# Altium PCB NANO33BLE.PcbDoc (part 1 of 2)
Units mm, origin at the board's own origin, x right, y up, seen from the top; angles counter-clockwise.
Board outline 43.18 x 17.78 mm, 4 copper layers (TOP, GND, SIG, BOTTOM), stack 1.586 mm thick; 73 components, 66 nets, 343 pads, 193 vias.
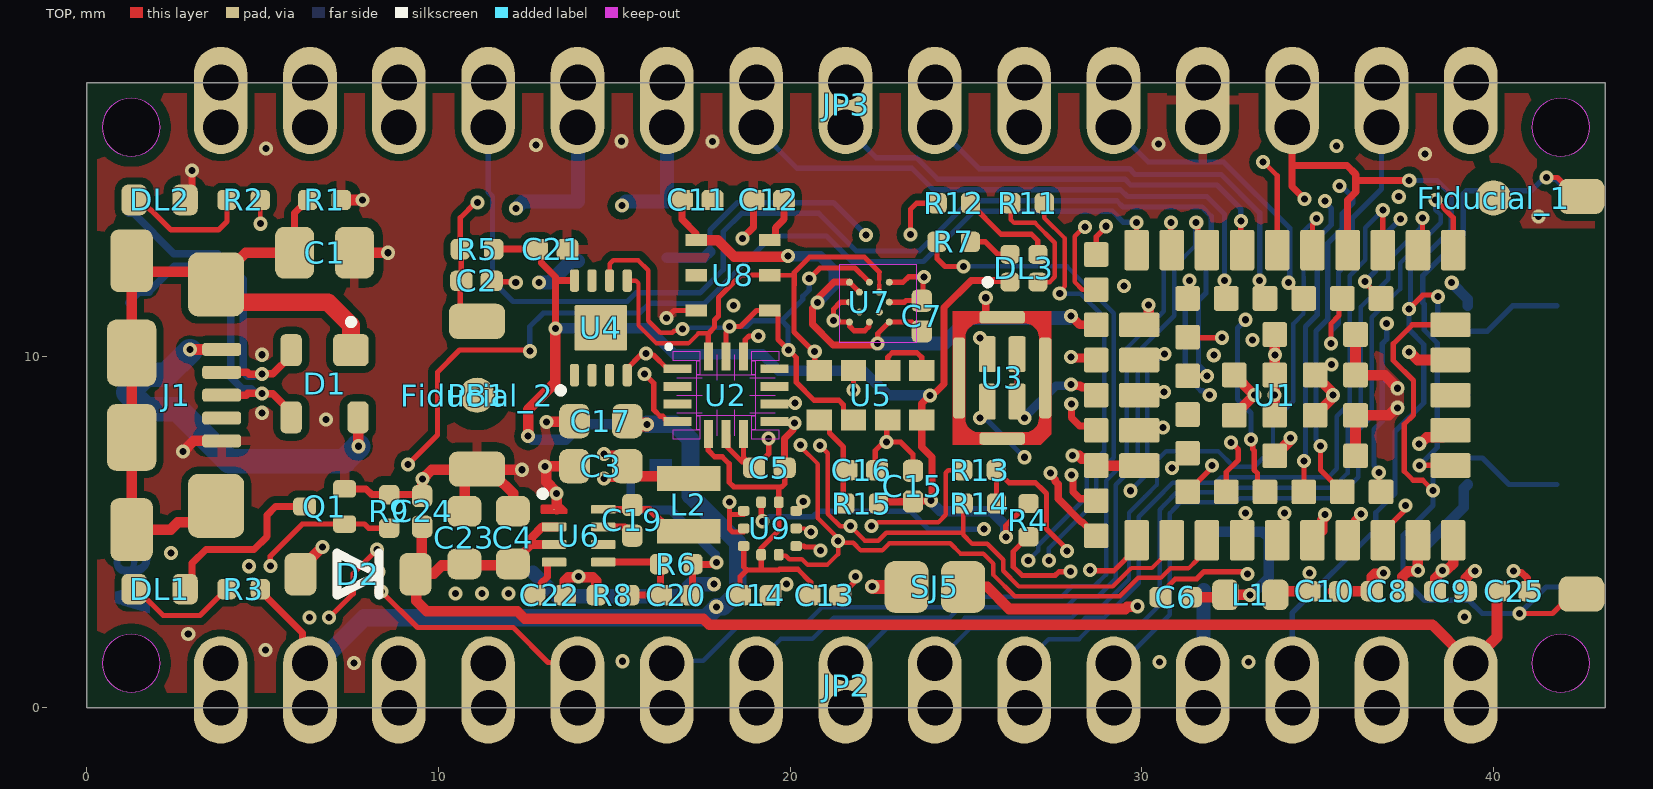
[diagram p0: TOP view]
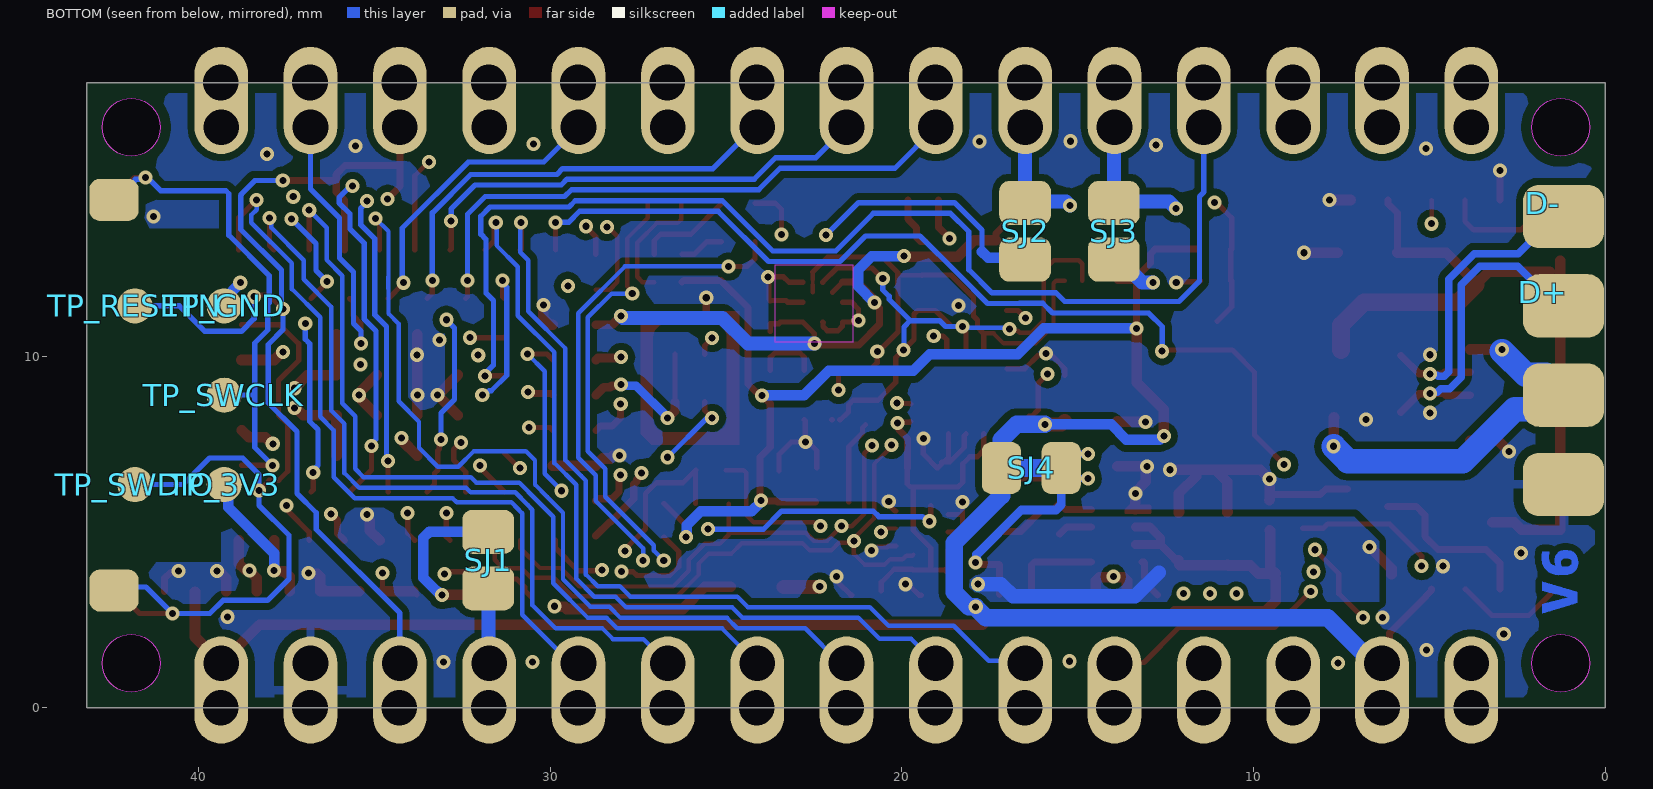
[diagram p1: BOTTOM view, seen from below]
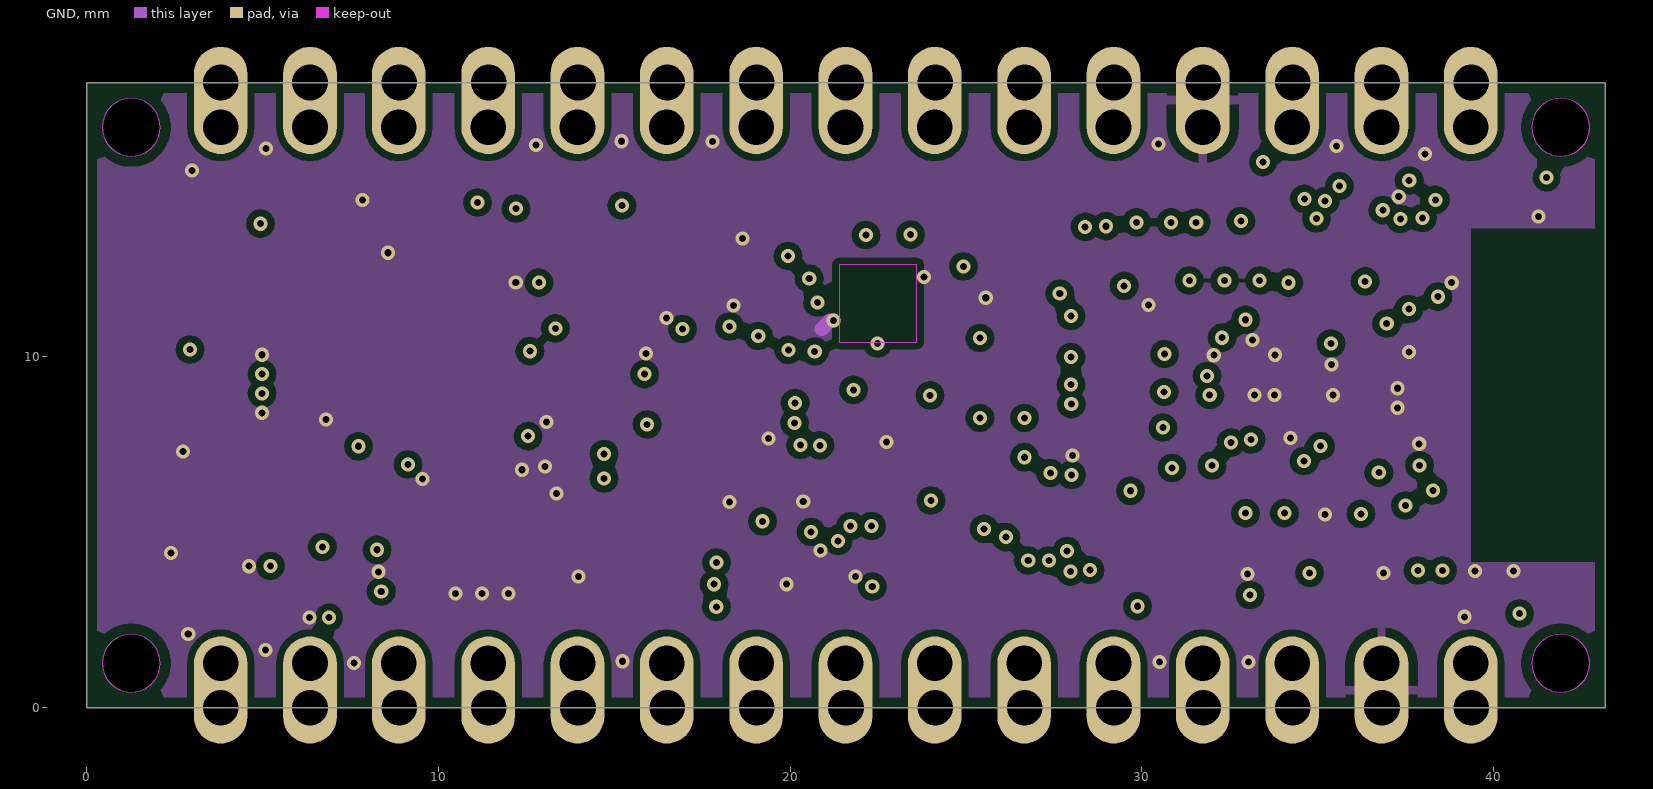
[diagram p2: GND]
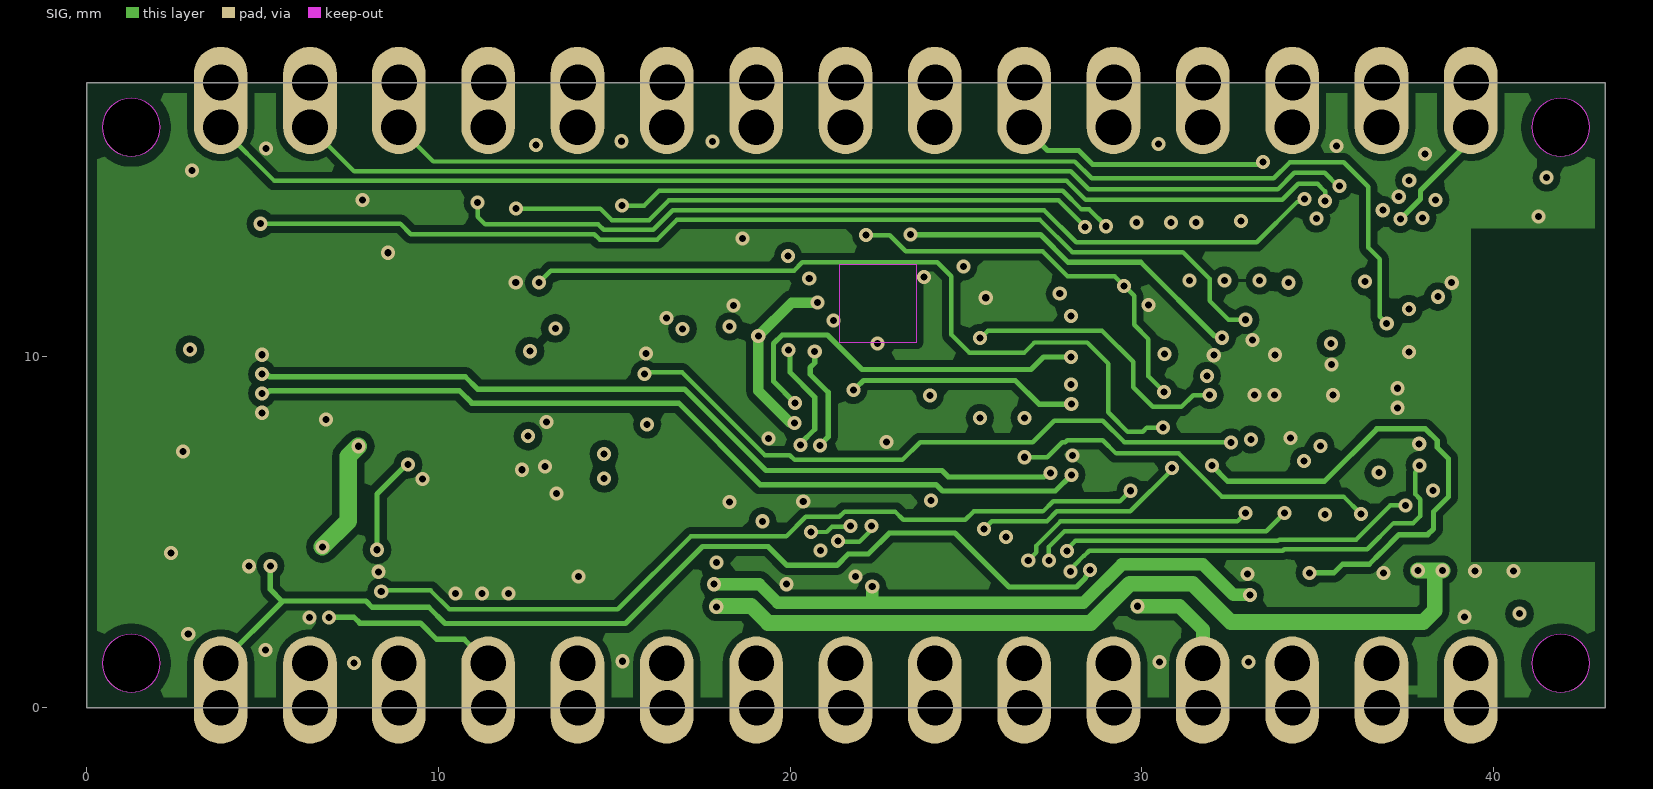
[diagram p3: SIG]
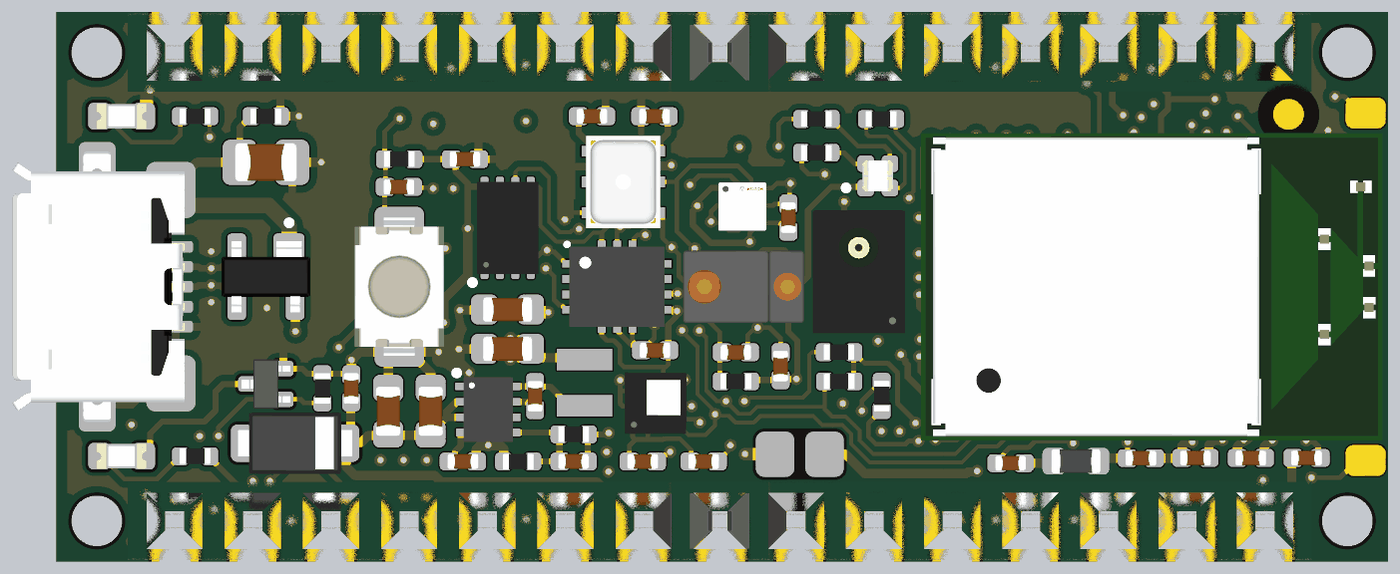
[diagram p5: 3D render of the assembled board from above, using the file's embedded part models]

## Layer stack, top to bottom
Top Solder: solder mask 0.0102, Solder Resist, Dk 3.5
TOP: signal copper 0.018
Dielectric 1: prepreg 0.14, PP-014, Dk 4.2
GND: signal copper 0.035
Dielectric2: core 1.2, FR-4, Dk 4.8
SIG: signal copper 0.035
Dielectric3: prepreg 0.14, PP-014, Dk 4.2
BOTTOM: signal copper 0.018
Bottom Solder: solder mask 0.0102, Solder Resist, Dk 3.5

## Board outline
43.18,0 0,0 0,17.78 43.18,17.78
cut-out: 41.91,0.445 ccw(c41.91,1.27) 42.735,1.27 ccw(c41.91,1.27) 41.91,2.095 ccw(c41.91,1.27) 41.084,1.27 ccw(c41.91,1.27)
cut-out: 41.91,15.684 ccw(c41.91,16.51) 42.735,16.51 ccw(c41.91,16.51) 41.91,17.335 ccw(c41.91,16.51) 41.084,16.51 ccw(c41.91,16.51)
cut-out: 1.27,15.684 ccw(c1.27,16.51) 2.095,16.51 ccw(c1.27,16.51) 1.27,17.335 ccw(c1.27,16.51) 0.445,16.51 ccw(c1.27,16.51)
cut-out: 1.27,0.445 ccw(c1.27,1.27) 2.095,1.27 ccw(c1.27,1.27) 1.27,2.095 ccw(c1.27,1.27) 0.445,1.27 ccw(c1.27,1.27)

## Design rules (kind name [scope] priority, off if disabled: settings)
BoardOutlineClearance USBbottomPADS [(ObjectKind = 'Pad') And (Component = 'Free') And (AsMM(PadXSize_AllLayers) = 2.3) And (AsMM(PadYSize_AllLayers) = 1.8)] p1: gap=0 ignorepadtopadclearanceinfootprint=FALSE
BoardOutlineClearance swdio_swclk [(ObjectKind = 'Pad') And (Name = 'Free-JTAG_PAD')] p2: gap=0 ignorepadtopadclearanceinfootprint=FALSE
BoardOutlineClearance Silk [(OnLayer('Top Overlay') OR OnLayer('Bottom Overlay'))] p3: gap=0 ignorepadtopadclearanceinfootprint=FALSE
BoardOutlineClearance MountingHoles [(ObjectKind = 'Pad') And (Name = 'Free-MH')] p4: gap=0 ignorepadtopadclearanceinfootprint=FALSE
BoardOutlineClearance Header_Castellated [((ObjectKind = 'Pad') And (Component = 'JP2')) OR                                                                                    ((ObjectKind = 'Pad') And (Component = 'JP3'))] p5: gap=0 ignorepadtopadclearanceinfootprint=FALSE
BoardOutlineClearance [All] p6: gap=0.3 ignorepadtopadclearanceinfootprint=FALSE
Clearance BGAclearance [WithinRoom('RoomU7')] p1: gap=0.108 ignorepadtopadclearanceinfootprint=TRUE
Clearance GND_POLYGONS [(InNamedPolygon('GND_TOP') OR InNamedPolygon('GND_2') OR InNamedPolygon('GND_3') OR InNamedPolygon('GND_BOT'))] p2: gap=0.2 ignorepadtopadclearanceinfootprint=FALSE
Clearance "Generic clearance 0.15mm" [All] p3: gap=0.15 ignorepadtopadclearanceinfootprint=FALSE
ComponentClearance [All] p1: gap=0 collisioncheckmode=3 verticalgap=0 showdistances=FALSE
DiffPairsRouting [InDifferentialPairClass('USB')] p1: maxlimit=0.254 minlimit=0.15 mostfreqgap=0.254 toplayer_maxgap=0.15 toplayer_prefgap=0.15 toplayer_minwidth=0.21 toplayer_maxwidth=0.21 toplayer_prefwidth=0.21 midlayer14_mingap=0.25 midlayer14_maxgap=0.25 midlayer14_prefgap=0.25 midlayer14_minwidth=0.15 midlayer14_maxwidth=0.15 midlayer14_prefwidth=0.15 bottomlayer_maxgap=0.15 bottomlayer_prefgap=0.15 bottomlayer_minwidth=0.21 bottomlayer_maxwidth=0.21 bottomlayer_prefwidth=0.21 impedanceprofiledriven=TRUE impedanceprofileid={9B09AC36-4A16-4C97-8BAC-77357264EF75} impedanceprofilevalue=90.000000 maxuncoupledlength=12.7
HoleSize [All] p1: absolutevalues=TRUE maxlimit=6 minlimit=0.2 maxpercent=80.000 minpercent=20.000
HoleToHoleClearance [All] p1: gap=0.25 allowstackedmicrovias=TRUE
MinimumSolderMaskSliver MinimumSolderMaskSliver_1 [(ObjectKind = 'Pad') And (Component = 'Fiducial_1') And (Name = 'Fiducial_1-1')] p1: minsoldermaskwidth=-1
MinimumSolderMaskSliver [All] p2: minsoldermaskwidth=0.147
NetAntennae Inductor [(ObjectKind = 'Component') And (Comment = 'MAKK2016T3R3M')] p1: netantennaetolerance=10
NetAntennae [All] p2: netantennaetolerance=0
PolygonConnect [All] p1: thpad.connectstyle=Relief thpad.reliefconductorwidth=0.254 thpad.reliefentries=4 thpad.polygonreliefangle="90 Angle" thpad.airgapwidth=0.254 smdpad.connectstyle=Relief smdpad.reliefconductorwidth=0.254 smdpad.reliefentries=4 smdpad.polygonreliefangle="90 Angle" smdpad.airgapwidth=0.254 via.connectstyle=Direct via.reliefconductorwidth=0.254 via.reliefentries=4 via.polygonreliefangle="90 Angle" via.airgapwidth=0.254
RoomDefinition RoomU7 [All] p1: confinementstyle=ConfineIn formatcopy=TRUE lockcomponents=FALSE outline 21.348,12.507 23.7,12.507 23.7,10.4 21.348,10.4
RoomDefinition NANO33BLE [InComponentClass('NANO33BLE')] p2: confinementstyle=ConfineIn formatcopy=TRUE lockcomponents=FALSE outline 0,0 43.18,0 43.18,17.78 0,17.78
RoutingVias [All] p1: holewidth=0.2 width=0.4 viastyle="Through Hole" minholewidth=0.2 minwidth=0.4 maxholewidth=0.2 maxwidth=0.4
ShortCircuit SJ4 [Component = 'SJ4' vs (InNet('+3V3') OR InNet('NetC3_2'))] p1: allowed=TRUE
ShortCircuit [All] p2: allowed=FALSE
SilkToSilkClearance [All] p1: silktosilkclearance=0.2
SilkToSolderMaskClearance [IsPad] p1: minsilkscreentomaskgap=0 clearancetoexposedcopper=TRUE
SolderMaskExpansion Solder_VIA [IsVia] p1: expansion=0.102 istentingtop=TRUE
SolderMaskExpansion [All] p2: expansion=0.102 istentingtop=FALSE
UnRoutedNet [All] p1: checkbadconnections=TRUE
Width BGAwidth [WithinRoom('RoomU7')] p1: maxlimit=3 minlimit=0.108 preferedwidth=0.15 midlayer1_minwidth=0.127 midlayer14_minwidth=0.127 bottomlayer_minwidth=0.127 minimp=50.000000 maximp=50.000000 favimp=50.000000
Width [All] p2: maxlimit=5 minlimit=0.127 preferedwidth=0.2 minimp=50.000000 maximp=50.000000 favimp=50.000000
20 further rules are at their usual default settings.

## Classes and differential pairs
differential pair class USB: USB
pad class SMDPaste_OFF: FD1-P$1 J3-4
differential pair USB: +USB_P -USB_N

## Components (designator, comment, footprint, x,y, rotation, side; value= is the part's Value field where it differs from the comment)
C1 "FV21X472K102ECG" CAP-0805 6.765,12.94 r180 top value=4.7nF
C2 "GRM155R61H104KE19D" CAP-0402 11.085,12.14 r0 top value=100nF
C3 "C1608A106M250NT" CAP-0603 14.62,6.87 r0 top value=10µF
C4 "C1608A106M250NT" CAP-0603 12.12,4.84 r270 top value=10µF
C5 "0402B104K160CT" CAP-0402 19.412,6.825 r180 top value=100nF
C6 "GRM155R71H102KA01D" CAP-0402 30.965,3.148 r180 top value=1nF
C7 "GRM155R61H104KE19D" CAP-0402 23.745,11.14 r270 top value=100nF
C8 "GRM155R61H104KE19D" CAP-0402 36.975,3.32 r0 top value=100nF
C9 "GRM155R61H104KE19D" CAP-0402 38.775,3.32 r0 top value=100nF
C10 "GRM155R71H102KA01D" CAP-0402 35.2,3.312 r0 top value=1nF
C11 "GRM155R61H104KE19D" CAP-0402 17.362,14.44 r0 top value=100nF
C12 "GRM155R61H104KE19D" CAP-0402 19.392,14.44 r180 top value=100nF
C13 "C1005B103K500NT" CAP-0402 20.991,3.205 r0 top value=10nF
C14 "C1005A475M6R3NT" CAP-0402 19.012,3.205 r0 top value=4.7µF
C15 "CL05A105KP5NNNC" CAP-0402 23.494,6.305 r270 top value=1µF
C16 "CL05A105KP5NNNC" CAP-0402 22.038,6.76 r180 top value=1µF
C17 "C1608A106M250NT" CAP-0603 14.62,8.15 r0 top value=10µF
C19 "GRM155R61H104KE19D" CAP-0402 15.515,5.33 r270 top value=100nF
C20 "0402N220J500CT" CAP-0402 16.765,3.205 r0 top value=22pF
C21 "GRM155R61H104KE19D" CAP-0402 13.235,13.04 r180 top value=100nF
C22 "CL05A105KP5NNNC" CAP-0402 13.165,3.205 r180 top value=1µF
C23 "C1608A106M250NT" CAP-0603 10.74,4.84 r270 top value=10µF
C24 "GRM155R61H104KE19D" CAP-0402 9.54,5.585 r90 top value=100nF
C25 "CL05A105KP5NNNC" CAP-0402 40.585,3.32 r180 top value=1µF
D1 "PRTR5V0U2X,215" SOT190P230X110-4N 6.765,9.215 r180 top
D2 "PMEG6020AELRX" SOD123-1 7.715,3.8 r180 top
D+ "CMP-018-0005-A.3" TP-1.00MM#1 1.778,11.811 r0 top
D- "CMP-018-0005-A.3" TP-1.00MM#1 1.778,14.351 r0 top
DL1 "KPT-1608YC" LEDC1608X80N-AK 2.075,3.375 r180 top
DL2 "HSMG-C190" LEDC1608X80N-AK 2.075,14.44 r180 top
DL3 "SMLP34RGB2W3" SMLP34RGB2W 26.65,12.5 r0 top
Fiducial_1 "Fiducial mark 1mm with 2mm solder" "Fiducial mark 1mm with circle-Footprint-1" 40,14.5 r90 top
Fiducial_2 "Fiducial mark 1mm with 2mm solder" "Fiducial mark 1mm with circle-Footprint-1" 11.1,8.89 r90 top
J1 "ZX62-AB-5PA(31)" ZX62-AB-5PA 1.28,8.89 r270 top
JP2 "PINHD-1X15-NANO-ANALOG-CASTELLATED" PINHD-1X14_5VF#1 3.81,1.27 r180 top locked
JP3 "PINHD-1X15-NANO-DIGITAL-CASTELLATED" PINHD-1X14_5VF#2 39.37,16.51 r0 top locked
L1 "BLM18EG101TN1D" L-0603 33.088,3.213 r0 top
L2 "MAKK2016T3R3M" MAKK2016T3R3M-Footprint-1 17.12,5.77 r90 top value=3.3µH
PB1 "IT-1185AP1C-160G-GTR" C&K_PTS820_NO_HOLES-1 11.1,8.89 r90 top
Q1 "2N7002T-7-F" SOT523 6.765,5.725 r90 top
R1 "CRCW04021M00FKED" RES-0402 6.765,14.44 r180 top value=1M
R2 "CRCW0402330RJNED" RES-0402 4.465,14.44 r0 top value=330
R3 "CRCW0402330RJNED" RES-0402 4.465,3.375 r0 top value=330
R4 "RC0402FR-074K7L" RES-0402 26.779,5.335 r90 top value=4.7k
R5 "RC0402FR-074K7L" RES-0402 11.1,13.04 r0 top value=4.7k
R6 "CRCW0402976KFKED" RES-0402 16.765,4.085 r0 top value=976k
R7 "CRCW04021K00FKEDC" RES-0402 24.655,13.25 r0 top value=1k
R8 "CRCW0402220KFKED" RES-0402 14.965,3.205 r0 top value=220k
R9 "CRCW0402976KFKED" RES-0402 8.6,5.585 r270 top value=976k
R11 "CRCW04021K00FKEDC" RES-0402 26.755,14.35 r180 top value=1k
R12 "CRCW04021K00FKEDC" RES-0402 24.655,14.35 r0 top value=1k
R13 "RC0402FR-074K7L" RES-0402 25.388,6.76 r0 top value=4.7k
R14 "RC0402FR-074K7L" RES-0402 25.395,5.81 r0 top value=4.7k
R15 "RC0402FR-0722RL" RES-0402 22.038,5.81 r0 top value=22
SJ1 "SMD solder JUMPER 0805" SJ#1 31.762,4.2 r270 bottom
SJ2 "SMD solder JUMPER 0805" SJ#1 16.5,13.55 r90 bottom
SJ3 "SMD solder JUMPER 0805" SJ#1 13.975,13.55 r90 bottom
SJ4 "SMD solder JUMPER CLOSED" SJ#2 16.32,6.82 r0 bottom
SJ5 "SMD solder JUMPER 0805" SJ#1 24.115,3.439 r0 top
TP_3V3 "CMP-018-0005-A.3" TP-1.00MM#2 39.268,6.35 r90 bottom
TP_GND "CMP-018-0005-A.3" TP-1.00MM#2 39.268,11.43 r90 bottom
TP_RESETN "CMP-018-0005-A.3" TP-1.00MM#2 41.808,11.43 r90 bottom
TP_SWCLK "CMP-018-0005-A.3" TP-1.00MM#2 39.268,8.89 r90 bottom
TP_SWDIO "CMP-018-0005-A.3" TP-1.00MM#2 41.808,6.35 r90 bottom
U1 "NINA-B306" NINA-B3X 35.552,8.89 r0 top locked
U2 "BMI270" VFLGA14 18.177,8.89 r0 top locked
U3 "MP34DT06JTR" HCLGA 26.03,9.381 r90 top locked
U4 "ATECC608A-MAHDA-T" UDFN8 14.62,10.805 r0 top
U5 "APDS-9960" APDS-9660-Footprint-1 22.289,8.89 r0 top locked
U6 "MP2322GQH" QFN50P150X200X90-8L 13.99,4.895 r0 top
U7 "BMM150" FP-BMM150-MFG 22.289,11.5 r0 top
U8 "HS3003" HS3003-Footprint-1 18.377,12.3 r90 top
U9 "LPS22HBTR" LPS22H 19.427,5.1 r0 top

## Footprints (in the part's own frame and the unit in brackets; to place one, negate y for a bottom-side part, rotate by r counter-clockwise, add the part's x,y. Pads: shape width x height; smd on the part's side, far side on the other; paste and mask are expansions set on the pad)
APDS-9660-Footprint-1 [mm]
  rect 0.72x0.6 smd mask+0.05: 1(-1.455,0.7) 2(-0.485,0.7) 3(0.485,0.7) 4(1.455,0.7) 5(1.455,-0.7) 6(0.485,-0.7) 7(-0.485,-0.7) 8(-1.455,-0.7)
  body extent -1.97,-1.18 1.97,1.18, height 1.3
C&K_PTS820_NO_HOLES-1 [mm]
  rrect49% 1x1.6 smd mask+0.05: 1(-2.1,0) 2(2.1,0)
  body extent -2.25,-1.45 2.25,1.45, height 2
CAP-0402 [mm] "Chip Capacitor, 2-Leads, Body  0402 (in) 1005 (mm), IPC Medium Density"
  rrect52% 0.63x0.58 smd mask+0.05: 1(-0.435,0) 2(0.435,0)
  body extent -0.5,-0.25 0.5,0.25, height 0.5
CAP-0603 [mm] "Chip Capacitor, Body 0603 imperial,1.6x0.8mm, IPC High Density"
  rrect51% 0.87x0.97 smd mask+0.05: 1(-0.75,0) 2(0.75,0)
  body extent -0.8,-0.4 0.8,0.4, height 0.8
CAP-0805 [mm] "Chip Capacitor, Body 0805 imperial, 2.0x1.2mm, IPC Medium Density"
  rrect45% 1.11x1.47 smd mask+0.05: 1(-0.85,0) 2(0.85,0)
  body extent -1,-0.62 1,0.63, height 1.25
"Fiducial mark 1mm with circle-Footprint-1" [mm]
  round 1 smd paste-10 mask+0.5: 1(0,0)
  TOP pour cut-out: 0,1 0.383,0.924 0.707,0.707 0.924,0.383 1,0 1,0 0.924,-0.383 0.707,-0.707 0.383,-0.924 0,-1 0,-1 -0.383,-0.924 -0.707,-0.707 -0.924,-0.383 -1,0 -1,0 -0.924,0.383 -0.707,0.707 -0.383,0.924 0,1
FP-BMM150-MFG [mm]
  round 0.2 smd mask+0.02: A1(-0.601,0.601) A3(-0.035,0.601) A5(0.531,0.601) B2(-0.318,0.318) B4(0.248,0.318) C1(-0.601,0.035) C5(0.531,0.035) D2(-0.318,-0.248) D4(0.248,-0.248) E1(-0.601,-0.531) E3(-0.035,-0.531) E5(0.531,-0.531)
  body extent -1.3,-1.3 1.3,1.3, height 0.25
HCLGA [mm]
  rrect22% 1.02x0.48 smd paste+0 mask+0: 1(-0.675,-0.425) 2(0.675,-0.425) 3(0.675,0.425) 4(-0.675,0.425)
  rrect50% 0.35x1.3 smd paste+0 mask+0: 5(-1.725,0) 5(1.725,0)
  rrect50% 2.3x0.35 smd paste+0 mask+0: 5(0,1.225) 5(0,-1.225)
  TOP region: 1.9,0 1.9,1.4 -1.9,1.4 -1.9,-1.1 -1.6,-1.4 1.9,-1.4 1.9,0 1.55,0 1.55,-0.65 1.52,-0.803 1.433,-0.933 1.303,-1.02 1.15,-1.05 1.15,-1.05 -1.15,-1.05 -1.303,-1.02 -1.433,-0.933 -1.52,-0.803 -1.55,-0.65 -1.55,-0.65 -1.55,0.65 -1.52,0.803 -1.433,0.933 -1.303,1.02 -1.15,1.05 -1.15,1.05 1.15,1.05 1.303,1.02 1.433,0.933 1.52,0.803 1.55,0.65 1.55,0.65 1.55,0
  body extent -2,-1.5 2,1.5, height 1
HS3003-Footprint-1 [mm]
  rect 0.35x0.61 smd mask+0.05: 1(-1,-1.05) 2(0,-1.05) 3(1,-1.05) 4(1,1.05) 5(0,1.05) 6(-1,1.05)
  body extent -1.5,-1.2 1.5,1.2, height 0.9
L-0603 [mm] "Chip Inductor - Body 0603 imperial,1.6x0.8mm, IPC High Density"
  rrect51% 0.75x0.87 smd mask+0: 1(-0.71,0) 2(0.71,0)
  body extent -0.8,-0.4 0.8,0.4, height 0.8
LEDC1608X80N-AK [mm]
  rrect50% 0.72x0.87 smd: A(0.725,0) C(-0.725,0)
  body extent -0.8,-0.4 0.8,0.4, height 0.79
LPS22H [mm]
  rrect50% 0.28x0.33 smd mask+0.02: 1(-0.25,-0.745) 2(0.25,-0.745) 6(0.25,0.745) 7(-0.25,0.745)
  rrect50% 0.33x0.28 smd mask+0.02: 3(0.745,-0.5) 4(0.745,0) 5(0.745,0.5) 8(-0.745,0.5) 9(-0.745,0) 10(-0.745,-0.5)
  body extent -1,-1 1,1, height 0.8
MAKK2016T3R3M-Footprint-1 [mm]
  rect 0.7x1.8 smd mask+0.05: 1(-0.75,0) 2(0.75,0)
  body extent -1,-0.8 1,0.8, height 1
NINA-B3X [mm]
  rrect18% 0.7x1.15 smd paste+0 mask+0: 1(-5.7,-4.125) 2(-4.7,-4.125) 3(-3.7,-4.125) 4(-2.7,-4.125) 5(-1.7,-4.125) 6(-0.7,-4.125) 7(0.3,-4.125) 8(1.3,-4.125) 9(2.3,-4.125) 10(3.3,-4.125) 16(3.3,4.125) 17(2.3,4.125) 18(1.3,4.125) 19(0.3,4.125) 20(-0.7,4.125) 21(-1.7,4.125) 22(-2.7,4.125) 23(-3.7,4.125) 24(-4.7,4.125) 25(-5.7,4.125)
  rrect18% 1.15x0.7 smd paste+0 mask+0: 11(3.225,-2) 12(3.225,-1) 13(3.225,0) 14(3.225,1) 15(3.225,2) 26(-5.625,2) 27(-5.625,1) 28(-5.625,0) 29(-5.625,-1) 30(-5.625,-2)
  rrect18% 0.7x0.7 smd paste+0 mask+0: 31(-4.25,-2.75) 32(-3.15,-2.75) 33(-2.05,-2.75) 34(-0.95,-2.75) 35(0.15,-2.75) 36(1.25,-2.75) 37(1.25,2.75) 38(0.15,2.75) 39(-0.95,2.75) 40(-2.05,2.75) 41(-3.15,2.75) 42(-4.25,2.75) 43(-4.25,1.65) 44(-4.25,0.55) 45(-4.25,-0.55) 46(-4.25,-1.65) 47(-6.85,4) 48(-6.85,3) 49(-6.85,2) 50(-6.85,1) 51(-6.85,0) 52(-6.85,-1) 53(-6.85,-2) 54(-6.85,-3) 55(-6.85,-4) GND1(0.525,-1.725) GND2(0.525,-0.575) GND3(0.525,0.575) GND4(0.525,1.725) GND5(-0.625,-0.575) GND6(-0.625,0.575) GND7(-1.775,-1.725) GND8(-1.775,-0.575) GND9(-1.775,0.575) GND10(-1.775,1.725) GND11(-2.925,-0.575) GND12(-2.925,0.575)
  body extent -8.2,-5 7.5,5, height 2.27
PINHD-1X14_5VF#1 [mil]
  round 27.56 hole 40 mask+7.87: 1(0,50) 2(-100,50) 3(-200,50) 4(-300,50) 5(-400,50) 6(-500,50) 7(-600,50) 8(-700,50) 9(-800,50) 10(-900,50) 11(-1000,50) 12(-1100,50) 13(-1200,50) 14(-1300,50) 15(-1400,50)
  oval 60x120 hole 40 copper offset 0,30 paste-99999: 1(0,0) 2(-100,0) 3(-199.41,0) 4(-299.41,0) 5(-399.41,0) 6(-499.41,0) 7(-599.41,0) 8(-699.41,0) 9(-799.41,0) 10(-899.41,0) 11(-999.41,0) 12(-1099.41,0) 13(-1199.41,0) 14(-1299.41,0) 15(-1399.41,0)
  body extent -1454,-50 60,50, height 335
PINHD-1X14_5VF#2 [mil]
  oval 60x120 hole 40 copper offset 0,30 paste-99999: 1(-0.59,0) 2(-100.59,0) 3(-200.59,0) 4(-300.59,0) 5(-400.59,0) 6(-500.59,0) 7(-600.59,0) 8(-700.59,0) 9(-800.59,0) 10(-900.59,0) 11(-1000.59,0) 12(-1100.59,0) 13(-1200.59,0) 14(-1300,0) 15(-1400,0)
  round 27.56 hole 40 mask+7.87: 1(0,50) 2(-100,50) 3(-200,50) 4(-300,50) 5(-400,50) 6(-500,50) 7(-600,50) 8(-700,50) 9(-800,50) 10(-900,50) 11(-1000,50) 12(-1100,50) 13(-1200,50) 14(-1300,50) 15(-1400,50)
  body extent -1460,-50 54,50, height 335
QFN50P150X200X90-8L [mm] "QFN, 8-Leads, Body 1,50x2,00mm, Pitch 0,50mm, IPC High Density"
  round 0.025 smd mask+0.05: 1(-0.7,0.75)
  rrect25% 0.7x0.25 smd mask+0.05: 2(-0.7,0.25) 3(-0.7,-0.25) 4(-0.7,-0.75) 5(0.7,-0.75) 6(0.7,-0.25) 7(0.7,0.25) 8(0.7,0.75)
  TOP region: -1.044,0.625 -1.056,0.627 -1.066,0.634 -1.073,0.644 -1.075,0.656 -1.075,0.656 -1.075,0.844 -1.073,0.856 -1.066,0.866 -1.056,0.873 -1.044,0.875 -1.044,0.875 -0.452,0.875 -0.325,0.748 -0.325,0.656 -0.327,0.644 -0.334,0.634 -0.344,0.627 -0.356,0.625 -0.356,0.625
  silkscreen extent -1.07,1.14 -0.97,1.24, body extent -0.8,-1.05 0.8,1.05, height 0.9
RES-0402 [mm] "Chip Resistor, 2-Leads, Body  0402 (in) 1005 (mm), IPC Medium Density"
  rrect51% 0.55x0.58 smd mask+0.05: 1(-0.475,0) 2(0.475,0)
  body extent -0.5,-0.25 0.5,0.25, height 0.34
SJ#1 [mm]
  rrect45% 1.25x1.47 smd: 1(-0.805,0) 2(0.805,0)
SJ#2 [mm]
  rrect45% 1.11x1.47 smd mask+0: 1(-0.85,0) 2(0.85,0)
  TOP region: -0.31,0.254 -0.31,-0.254 0.31,-0.254 0.31,0.254
SMLP34RGB2W [mm]
  rrect52% 0.54x0.54 smd mask+0.05: 1(-0.395,-0.395) 2(-0.395,0.395) 3(0.395,0.395) 4(0.395,-0.395)
  silkscreen extent -1.08,-0.44 -0.98,-0.35, body extent -0.5,-0.5 0.5,0.5, height 0.2
SOD123-1 [mm]
  rrect50% 0.91x1.22 smd: A(1.635,0) C(-1.635,0)
  silkscreen extent -0.6,-0.6 0.6,0.6, body extent -1.85,-1 1.85,1, height 1.2
SOT190P230X110-4N [mm]
  rrect33% 1.01x0.91 smd paste+0 mask+0.05: 1(-0.75,-0.955)
  rrect49% 0.61x0.91 smd paste+0 mask+0.05: 2(0.95,-0.955) 3(0.95,0.955) 4(-0.95,0.955)
  silkscreen extent -0.8,-1.8 -0.7,-1.71, body extent -1.45,-1.15 1.45,1.15, height 1
SOT523 [mm]
  rrect50% 0.5x0.66 smd: D(0,0.57) G(-0.5,-0.57) S(0.5,-0.57)
  body extent -0.8,-0.8 0.8,0.8, height 0.8
TP-1.00MM#1 [mm]
  round 1 smd far side paste-2.54 mask+0: X(0,0)
TP-1.00MM#2 [mm]
  rrect100% 1x1 smd paste-2.54: X(0,0)
UDFN8 [mm] "QFN, 8-Leads, Body 3.00x2.00mm, Pitch 0.50mm, Thermal Pad 1.30x1.50mm, IPC Medium Density"
  rrect54% 0.26x0.64 smd paste+0 mask+0.05: 1(-0.75,-1.345) 2(-0.25,-1.345) 3(0.25,-1.345) 4(0.75,-1.345) 5(0.75,1.345) 6(0.25,1.345) 7(-0.25,1.345) 8(-0.75,1.345)
  rrect8% 1.5x1.3 smd paste-1.5 mask+0.05: 9(0,0)
  silkscreen extent -1.19,-1.83 -1.09,-1.73, body extent -1,-1.5 1,1.5, height 0.55
VFLGA14 [mm]
  rect 0.8x0.25 smd mask+0.05: 1(-1.375,0.75) 2(-1.375,0.25) 3(-1.375,-0.25) 4(-1.375,-0.75) 8(1.375,-0.75) 9(1.375,-0.25) 10(1.375,0.25) 11(1.375,0.75)
  rect 0.25x0.8 smd mask+0.05: 5(-0.5,-1.1) 6(0,-1.1) 7(0.5,-1.1) 12(0.5,1.1) 13(0,1.1) 14(-0.5,1.1)
  TOP keep-out region: -0.83,-0.98 -0.83,-0.58 -0.74,-0.58 -0.74,-0.98
  TOP keep-out region: 0.74,-0.98 0.74,-0.58 0.83,-0.58 0.83,-0.98
  TOP keep-out region: 0.74,0.58 0.74,0.98 0.83,0.98 0.83,0.58
  TOP keep-out region: -0.83,0.58 -0.83,0.98 -0.74,0.98 -0.74,0.58
  TOP keep-out region: -1.5,-1.25 -1.5,-0.98 -0.74,-0.98 -0.74,-1.25
  TOP keep-out region: 0.74,-1.25 0.74,-0.98 1.5,-0.98 1.5,-1.25
  TOP keep-out region: 0.74,0.98 0.74,1.25 1.5,1.25 1.5,0.98
  TOP keep-out region: -1.5,0.98 -1.5,1.25 -0.74,1.25 -0.74,0.98
  TOP keep-out region: -0.83,-0.58 -0.83,0.58 0.83,0.58 0.83,-0.58
  TOP keep-out lines w0.01: -1.4,-0.5 -0.67,-0.5 ; -1.4,0 -0.67,0 ; -1.4,0.5 -0.67,0.5 ; -0.25,-1.15 -0.25,-0.42 ; -0.25,0.42 -0.25,1.15 ; 0.25,-1.15 0.25,-0.42 ; 0.25,0.42 0.25,1.15 ; 0.67,-0.5 1.4,-0.5 ; 0.67,0 1.4,0 ; 0.67,0.5 1.4,0.5
  silkscreen extent -1.67,1.32 -1.58,1.42, body extent -1.55,-1.3 1.55,1.3, height 0.86
ZX62-AB-5PA [mm]
  rrect49% 0.37x1.11 smd paste+0 mask+0: 1(-1.3,2.56) 2(-0.65,2.56) 3(0,2.56) 4(0.65,2.56) 5(1.3,2.56)
  rrect37% 1.825x1.6 smd paste+0 mask+0: M1(-3.147,2.4) M4(3.147,2.4)
  rrect37% 1.78x1.2 smd paste+0 mask+0: M2(-3.82,0) M3(3.82,0)
  rrect37% 1.9x1.4 smd paste+0 mask+0: M5(-1.2,0) M6(1.2,0)
  body extent -4.4,-2.75 4.4,2.85, height 2.75

## Part data
C1: library part C0059-A.14, "CAP CHIP 0805 4.7nF 10% 1000V X7R", Case Code (Imperial)=0805, Dielectric=X7R, Manufacturer="PSA Shenzen", Manufacturer 2=KEMET, Part number 2=C0805V472KDRACTU, Part number 3=C0805C472KDRACTU, Tolerance=10%, Voltage=1kV, Code Arduino=0689, Manufacturer 3=KEMET, Part Number=FV21X472K102ECG, Technology=Ceramic
C2 C7 C8 C9 C11 C12 C19 C21 C24: library part C0015-A.14, "CAP CHIP 0402 100nF 10% 50V X5R", Case Code (Imperial)=0402, Dielectric=X5R, Manufacturer=Murata, Tolerance=10%, Voltage=50V, Code Arduino=A5141, Part Number=GRM155R61H104KE19D, Technology=Ceramic
C3 C4 C17 C23: library part C0047-A.18, "CAP CHIP 0603 10uF 20% 25V X5R", Case Code (Imperial)=0603, Dielectric=X5R, Manufacturer=Hottech, Manufacturer 2="Murata Electronics", Part number 2=CL10A106MA8NRNC, Tolerance=20%, Voltage=25V, Code Arduino=2213, Part Number=C1608A106M250NT, Technology=Ceramic
C5: library part C0012-A.15, "CAP CHIP 0402 100nF 10% 16V X7R", Case Code (Imperial)=0402, Dielectric=X7R, Manufacturer=Walsin, Tolerance=10%, Voltage=16V, Code Arduino=0132, Part Number=0402B104K160CT, Technology=Ceramic
C6 C10: library part C0007-A.15, "CAP CHIP 0402 1nF 10% 50V X7R", Case Code (Imperial)=0402, Dielectric=X7R, Manufacturer=KEMET, Tolerance=10%, Voltage=50V, Code Arduino=2321, Part Number=GRM155R71H102KA01D, Technology=Ceramic
C13: library part C0009-A.15, "CAP CHIP 0402 10nF 10% 50V X7R", Case Code (Imperial)=0402, Dielectric=X7R, Manufacturer=Hottech, Manufacturer 2="Murata Electronics", Manufacturer 3=YAGEO, Part number 2=CC0402KRX7R9BB103, Tolerance=10%, Voltage=50V, Code Arduino=0165, Part Number=C1005B103K500NT, Technology=Ceramic
C14: library part C0037-A.14, "CAP CHIP 0402 4.7uF 20% 6V3 X5R", Case Code (Imperial)=0402, Dielectric=X5R, Manufacturer=Hottech, Manufacturer 2="Samsung Electro-Mechanics", Manufacturer 3="Murata Electronics", Part number 2=CL05A475KQ5NRNC, Part number 3=GRM155R60J475ME47D, Tolerance=20%, Voltage=6.3V, Code Arduino=0833, Part Number=C1005A475M6R3NT, Technology=Ceramic
C15 C16 C22 C25: library part C0017-A.14, "CAP CHIP 0402 1uF 10% 10V X5R", Case Code (Imperial)=0402, Dielectric=X5R, Manufacturer="Samsung Electro-Mechanics", Manufacturer 2="Murata Electronics", Part number 2=GCM155C71A105KE38D, Tolerance=10%, Voltage=10V, Code Arduino=0133, Part Number=CL05A105KP5NNNC, Technology=Ceramic
C20: library part C0029-A.14, "CAP CHIP 0402 22pF 5% 50V C0G", Case Code (Imperial)=0402, Dielectric=C0G, Manufacturer=Walsin, Manufacturer 2="Murata Electronics", Manufacturer 3=KEMET, Part number 2=GRM1555C1H220JA01D, Part number 3=C0402C220K5GAC7867, Tolerance=5%, Voltage=50V, Code Arduino=0137, Part Number=0402N220J500CT, Technology=Ceramic
D1: library part D0025-A.5, "TVS ARRAY 4LIN.8kV 1pF SOT143B", Manufacturer=Nexperia, Code Arduino=2209, Device Type="ESD protection", Part Number=PRTR5V0U2X,215
D2: library part D0026-A.6, "DIODE SCHOTTKY SMD 2A 60V SOD123FL", Forward Current=2A, Forward Voltage=0.6V, Manucturer Part Number 2=SS26L, Manufacturer=Nexperia, Code Arduino=2208, Device Type="Diode Schottky", Manucturer 2=Hottech, Part Number=PMEG6020AELRX, RoHS Compliance=RoHS3
D+ D- TP_3V3 TP_GND TP_RESETN TP_SWCLK TP_SWDIO: library part UT0013-A.4, "Test point 1.00mm", Design Item ID=CMP-018-0005-A.3, Pin Count=1, Source=ut.SchLib
DL1: library part L0008-A.5, "LED SMD 0603 GIA588   8mcd 120^", Manufacturer=Kingbright, Code Arduino=2243, Part Number=KPT-1608YC, Pin Count=2
DL2: library part L0009-A.5, "LED SMD 0603 GREEN/568 15mcd 120^", Manufacturer=Broadcom, Code Arduino=2204, Part Number=HSMG-C190, Pin Count=2
DL3: library part L0014-A.11, "LED RGB DIFFUSED PICOLED SMD", Case Code (Imperial)=0404, Color=Blue,Green,Red, Forward Current=20mA, Forward Voltage=3V, Lens Color=White, Manufacturer="ROHM Semiconductor", Max Operating Temperature=85°C, Min Operating Temperature=-40°C, Package Quantity=1, Test Current=5mA, Code Arduino=A5469, Dominant Wavelength=470nm, Height=0.25mm, Lead Free="Lead Free", Length=1mm, Lens Style=Rectangular, Lens Transparency=Diffused, Luminous Intensity=45mcd, Mount="Surface Mount", Number of Pins=4, Packaging="Tape and Reel", Part Number=SMLP34RGB2W3, Pin Count=4, Width=1mm
Fiducial_1 Fiducial_2: library part UT0024-A.6
J1: library part J0039-A.7, "CONN USB MICRO F/90^ SMD TipoAB 5x1", Manufacturer=Hirose, Code Arduino=2219, Part Number=ZX62-AB-5PA(31)
JP2: library part J0158-A.4, "CONN THD SOCKET F/1/D 15V JANALOG NANO-TYPE CASTELLATED", Code Arduino=0646, Pin Count=15
JP3: library part J0183-A.4, "CONN THD SOCKET F/1/D 15V JDIGITAL NANO-TYPE CASTELLATED", Code Arduino=0646, Pin Count=15
L1: library part I0022-A.5, "FERRITE SMD 0603 45mOHM 2A", Case Code (Imperial)=0603, Case Code (Metric)=1608, Current=2A, DC Resistance (DCR)=45mR, Manufacturer=Murata, Max Operating Temperature=125°C, Min Operating Temperature=-55°C, Package Quantity=1, Test Frequency=100MHz, Tolerance=25%, Code Arduino=A5482, Device Type=Ferrite, Max DC Current=2A, Packaging="Tape and Reel", Part Number=BLM18EG101TN1D
L2: library part I0045-A.10, "IND CHIP 0806 3.3 uH 20% 1.2A", Case Code (Imperial)=0806, Case Code (Metric)=2016, Current Rating=1.2A, DC Resistance (DCR)=255mR, Inductance=3.3µH, Manufacturer="Taiyo Yuden", Manufacturer 2=Murata, Manufacturer Part Number 2=LQM2MPN3R3NG0L, Max DC Current=1.15A, Max Operating Temperature=105°C, Min Operating Temperature=-40°C, Package Quantity=3000, Resistor Type=Wirewound, Test Frequency=2MHz, Tolerance=20%, Case/Package=0806, Code Arduino=I0045, Core Material=Metal, Device Type=Inductor, Halogen Free="Halogen Free", Height=1mm, Height - Seated (Max)=0.039inch, Length=0.079inch, Mount="Surface Mount", Packaging="Tape and Reel", Part Number=MAKK2016T3R3M, Saturation Current=1.15A, Shielding=Shielded, Termination=SMD/SMT, Width=1.6mm
PB1: library part B0001-A.7, "PUSHBUTTON WHITE NO ANCHORS", Color=White, Manufacturer=Switronic, Code Arduino=0173, Mount=SMT, Part Number=IT-1185AP1C-160G-GTR
Q1: library part T0003-A.2, "MOSFET N-CH 60V 115mA SOT523", Manufacturer="Diodes Inc.", Code Arduino=2368, Device Type="Mosfet N-CH SMD", Part Number=2N7002T-7-F, Pin Count=3
R1: library part R0058-A.24, "RES CHIP 0402 1M 1% 1/16W", Case Code (Imperial)=0402, Manufacturer=Vishay, Power=62.5mW, Temperature Coefficient=100ppm, Tolerance=1%, Code Arduino=0139, Part Number=CRCW04021M00FKED, Technology="Thick film"
R2 R3: library part R0017-A.24, "RES CHIP 0402 330R 5% 1/16W", Case Code (Imperial)=0402, Manufacturer=Vishay, Power=62.5mW, Temperature Coefficient=200ppm, Tolerance=5%, Code Arduino=2229, Part Number=CRCW0402330RJNED, Technology="Thick film"
R4 R5 R13 R14: library part R0013-A.24, "RES CHIP 0402 4K7 1% 1/16W", Case Code (Imperial)=0402, Manufacturer=YAGEO, Power=62.5mW, Temperature Coefficient=200ppm, Tolerance=1%, Code Arduino=2196, Part Number=RC0402FR-074K7L, Technology="Thick film"
R6 R9: library part R0070-A.25, "RES CHIP 0402 976K 1% 1/16W", Case Code (Imperial)=0402, Manufacturer=Vishay, Power=62.5mW, Temperature Coefficient=100ppm, Tolerance=1%, Code Arduino=R0070, Part Number=CRCW0402976KFKED, Technology="Thick film"
R7 R11 R12: library part R0007-A.24, "RES CHIP 0402 1K 1% 1/16W", Case Code (Imperial)=0402, Manufacturer=Vishay, Power=62.5mW, Temperature Coefficient=100ppm, Tolerance=1%, Code Arduino=0140, Part Number=CRCW04021K00FKEDC, Technology="Thick film"
R8: library part R0028-A.24, "RES CHIP 0402 220K 1% 1/16W", Case Code (Imperial)=0402, Manufacturer=Vishay, Power=62.5mW, Temperature Coefficient=200ppm, Tolerance=1%, Code Arduino=2334, Part Number=CRCW0402220KFKED, Technology="Thick film"
R15: library part R0009-A.24, "RES CHIP 0402 22R 1% 1/16W", Case Code (Imperial)=0402, Manufacturer=YAGEO, Power=62.5mW, Temperature Coefficient=100ppm, Tolerance=1%, Code Arduino=0468, Part Number=RC0402FR-0722RL, Technology="Thick film"
SJ1 SJ2 SJ3 SJ5: library part UT0002-A.5, "Solder Jumper 0805 THIS IS NOT A COMPONENT", Code Arduino="This is not a component"
SJ4: library part UT0006-A.14, "Solder Jumper shorted pads. This is not a component"
U1: library part M0001-A.9, "MODULE BLE 5.0 STAND ALONE nRF52", Manufacturer=UBlox, Code Arduino=NINA-B306, Part Number=NINA-B306, Pin Count=67
U2: library part U0217-A.4, "IC IMU 6 AXIS 14VFLGA pin to pin alternative to LSM6DSOXTR", Manufacturer="Bosch Sensortec", Code Arduino=U0217, Part Number=BMI270
U3: library part U0074-A.6, "SENS MEMS AUDIO OMNIDIRECTIONAL", Manufacturer="ST Microelectronics", Code Arduino=A5470, Part Number=MP34DT06JTR
U4: library part U0034-A.8, "IC AUTHENTICATION CHIP UDFN8", Manufacturer=Microchip, Code Arduino=U0034, Part Number=ATECC608A-MAHDA-T
U5: library part U0136-A.9, "IC SENS OPT 560NM AMBIENT MODULE APDS-9960", Manufacturer=Broadcom, Code Arduino=A5475, Part Number=APDS-9960
U6: library part U0072-A.8, "IC STEP DOWN CONV 1A 22V QFN8", Manufacturer="Monolithic Power Systems", Code Arduino=U0072, Part Number=MP2322GQH
U7: library part U0153-A.4, "IC SENSOR 3-AXIS GEOMAGNETIC", Manufacturer="Bosch Sensortec", Code Arduino=U0153, Part Number=BMM150
U8: library part U0253-A.5, "IC PRESSURE AND TEMPERATURE SENSOR 6-LGA", Manufacturer=Renesas, Code Arduino=U0253, Part Number=HS3003
U9: library part U0009-A.7, "SENSOR PRESSURE 3.77 PSI ~ 18.27 PSI (26 kPa ~ 126 kPa) Absolute 24 b 10-WFLGA", Manufacturer="ST Microelectronics", Code Arduino=A5390, Part Number=LPS22HBTR

## Free pads (board coordinates)
  rrect50% 1.4x1.2 smd far side paste-8 mask+0.05: JTAG_PAD(42.403,3.336) JTAG_PAD(42.403,14.444)
  rrect50% 1.3x1 smd paste-8 mask+0.05: JTAG_PAD(42.503,3.236) JTAG_PAD(42.503,14.544)
  round 1.651 hole 1.651 unplated: MH(1.27,1.27) MH(1.27,16.51) MH(41.91,1.27) MH(41.91,16.51)
  rrect50% 2.3x1.8 smd far side paste-8 mask+0.05: USB_N(1.189,13.97) USB_P(1.189,6.35) USB_P(1.189,8.89) USB_P(1.189,11.43)

## Via types
v1: diameter 0.4, hole 0.2, TOP to BOTTOM, tented both sides, 193 vias

## Nets (pads, with @x,y where several pads share a name; then routed paths per layer and width w, separated by ;. In a path a pad name is that pad's centre, name@x,y a point inside that pad or via, vN(x,y) a via of type N, cw(c..) or ccw(c..) an arc to the next point about the centre after c; other vN are vias at no path point)
+3V3: C8.2 C9.1 C15.2 C17.2 C21.2 DL3.1 JP2.2 R3.2 R4.2 R5.2 R15.2 SJ4.2 TP_3V3.X U1.9 U1.10 U4.8 U5.5 | length 89.3
  TOP w0.15: v1(26.134,4.853) 26.134,5.181 26.764,5.81 R4.2@26.779,5.81
  TOP w0.2: R3.2@4.94,3.375 4.94,3.338 5.115,3.163 5.115,3.154 6.137,2.132 6.137,1.483 JP2.2@6.193,1.427 ; JP2.2@6.35,1.27 JP2.2@6.546,1.466 ; R5.2@11.575,13.04 C21.2@12.8,13.04 12.931,12.909 12.931,12.65 13.326,12.255 v1(13.326,10.791) ; 13.326,12.15 U4.8@13.87,12.15 ; R15.2@22.463,5.86 C15.2@23.534,5.86 ; C15.2@23.544,5.87 23.555,5.881 23.993,5.881 v1(24.004,5.892) 24.034,5.922 24.034,7.127 23.744,7.417 U5.5@23.744,8.19 23.744,8.65 v1(23.98,8.886) 24.034,8.886 24.134,8.986 24.153,8.986 24.38,9.213 24.38,10.583 24.38,11.384 25.141,12.145 26.215,12.145 DL3.1@26.255,12.105
  TOP w0.3: v1(12.55,7.725) 12.55,8.475 13.326,9.251 v1(13.326,10.791) ; C8.2@37.41,3.32 37.41,3.73 37.568,3.888 37.833,3.888 v1(37.852,3.907) U1.9@37.852,4.765 ; C9.1@38.34,3.32 38.34,3.685 38.552,3.897 v1(38.552,3.907) 38.571,3.926 38.676,3.926 38.852,4.102 U1.10@38.852,4.765
  TOP w0.4: C17.2@15.37,8.15 15.461,8.059 v1(15.937,8.059)
  SIG w0.45: v1@17.928,2.901 18.89,2.901 19.373,2.417 28.547,2.417 29.66,3.53 31.44,3.53 32.528,2.442 38,2.442 38.329,2.77 38.329,3.884 v1@38.352,3.907 ; v1(37.852,3.907) v1@38.352,3.907 ; v1(38.552,3.907) v1@38.352,3.907
  BOTTOM w0.3: v1(12.55,7.725) 12.577,7.725 12.677,7.625 13.617,7.625 14.052,8.059 v1(15.937,8.059) ; v1(13.326,10.791) 15.963,10.791 16.703,10.051 19.214,10.051 19.675,9.59 22.079,9.59 22.784,8.886 v1(23.98,8.886) ; 18.42,3.68 18.511,3.589 ; 18.511,3.289 18.611,3.389 ; v1(24.004,5.892) 24.004,5.865 24.276,5.593 25.719,5.593 26.115,5.197 26.115,4.872 v1(26.134,4.853) ; v1(37.852,3.907) 37.852,4.395 39.156,5.7 39.156,6.238 TP_3V3.X@39.268,6.35
  BOTTOM w0.5: JP2.2@6.35,1.27 6.598,1.27 7.888,2.56 17.609,2.56 17.902,2.853 v1(17.902,2.874) 18.096,2.874 18.511,3.289 18.511,3.589 18.511,4.689 17.17,6.03 SJ4.2@17.17,6.82 17.17,7.62 16.731,8.059 v1(15.937,8.059)
AIN0_A5/SCL: JP2.9 U1.18 | length 23.8
  TOP w0.15: U1.18@36.852,13.015 v1(36.852,14.149)
  BOTTOM w0.127: JP2.9@24.126,1.27 25.113,2.257 28.091,2.257 28.391,2.557 28.927,2.557 29.913,3.543 29.913,5.434 30.366,5.887 30.366,5.89 30.883,6.406 31.217,6.406 32.1,6.406 32.253,6.56 35.31,6.56 35.547,6.796 35.547,8.294 35.91,8.657 35.91,12.287 36.357,12.734 36.357,13.654 v1(36.852,14.149)
AIN1_A7: JP2.11 U1.16 | length 21.4
  TOP w0.15: v1(38.347,14.445) 38.852,13.94 U1.16@38.852,13.015
  BOTTOM w0.127: JP2.11@29.195,1.27 29.42,1.27 30.799,2.649 30.799,5.536 30.813,5.551 30.92,5.657 30.92,5.66 31.103,5.843 32.421,5.843 32.66,5.843 32.776,5.96 35.559,5.96 36.153,6.554 36.153,7.888 36.539,8.275 36.539,11.104 37.342,11.907 37.342,12.64 38.498,13.795 38.498,14.014 38.347,14.165 v1(38.347,14.445)
AIN2_A0: JP2.4 U1.25 | length 37.1
  TOP w0.15: v1(6.894,2.563) 7.578,3.248 7.578,3.821 v1(8.253,4.495) ; v1(9.134,6.917) 9.973,7.756 9.973,9.543 10.605,10.175 12.565,10.175 v1(12.6,10.14) ; v1(29.85,13.805) 29.85,13.017 U1.25@29.852,13.015
  SIG w0.15: v1(6.894,2.563) 6.905,2.575 7.601,2.575 7.768,2.408 9.492,2.408 9.949,1.951 10.734,1.951 JP2.4@11.415,1.27 ; v1(8.253,4.495) 8.253,6.078 9.092,6.917 v1(9.134,6.917)
  BOTTOM w0.15: v1(12.6,10.14) 12.6,10.84 12.985,11.225 15.716,11.225 15.995,11.504 16.656,11.504 16.66,11.5 17.565,11.5 18.398,12.333 19.484,13.418 21.032,13.418 21.759,12.691 23.796,12.691 25.224,14.119 29.162,14.119 29.476,13.805 v1(29.85,13.805)
AIN3_A1: JP2.5 U1.27 | length 34.6
  TOP w0.15: v1(8.376,3.312) 9.406,2.283 12.128,2.283 13.118,1.292 13.948,1.292 JP2.5@13.97,1.27 ; U1.27@29.927,9.89 30.096,10.06 v1(30.644,10.06)
  SIG w0.127: v1(8.376,3.312) 8.401,3.338 9.778,3.338 10.316,2.8 15.104,2.8 17.179,4.875 19.888,4.875 20.443,5.431 21.399,5.431 21.55,5.582 22.984,5.582 23.218,5.348 24.982,5.348 25.219,5.585 27.19,5.585 27.48,5.875 29.378,5.875 v1(29.675,6.173)
  BOTTOM w0.127: v1(29.675,6.173) 30.156,6.653 30.156,9.572 v1(30.644,10.06)
AIN4_A6: JP2.10 U1.17 | length 22.1
  TOP w0.15: U1.17@37.852,13.015 37.982,13.145 v1(37.982,13.928)
  BOTTOM w0.127: JP2.10@26.67,1.27 27.357,1.957 28.215,1.957 28.515,2.257 29.841,2.257 30.508,2.924 30.508,5.637 30.643,5.772 30.643,5.775 30.997,6.129 31.332,6.129 32.264,6.129 32.394,6.26 35.434,6.26 35.85,6.675 35.85,8.078 36.225,8.454 36.225,11.4 37.007,12.183 37.007,12.729 37.934,13.656 37.934,13.881 v1(37.982,13.928)
AIN5_A3: JP2.7 U1.23 | length 23.2
  TOP w0.15: v1(31.548,13.802) 31.594,13.756 31.594,13.273 U1.23@31.852,13.015
  BOTTOM w0.127: JP2.7@19.05,1.27 19.741,1.961 20.636,1.961 21.242,2.567 24.539,2.567 24.829,2.857 27.843,2.857 28.143,3.157 28.744,3.157 29.262,3.675 29.262,6.344 29.879,6.961 29.879,10.108 30.922,11.151 30.922,12.544 31.526,13.148 31.526,13.78 v1(31.548,13.802)
AIN6_A2: JP2.6 U1.24 | length 25.1
  TOP w0.15: v1(30.826,13.805) 30.826,13.04 U1.24@30.852,13.015
  BOTTOM w0.127: JP2.6@16.51,1.27 16.577,1.337 17.532,1.337 18.525,2.33 20.381,2.33 20.909,2.858 24.378,2.858 24.677,3.157 27.718,3.157 28.018,3.457 28.652,3.457 28.985,3.79 28.985,6.459 29.122,6.596 29.566,7.04 29.566,10.22 30.622,11.275 30.622,12.727 30.852,12.957 30.852,13.78 v1(30.826,13.805)
AIN7_A4/SDA: JP2.8 U1.20 | length 24.6
  TOP w0.15: U1.20@34.852,13.015 34.852,13.734 34.965,13.848 v1(34.965,13.915)
  BOTTOM w0.127: JP2.8@21.575,1.27 21.759,1.27 22.752,2.263 24.679,2.263 24.973,2.557 27.999,2.557 28.322,2.88 28.858,2.88 29.636,3.658 29.636,5.548 30.089,6.001 30.089,6.004 30.433,6.348 30.433,7.036 30.698,7.302 32.169,7.302 32.611,6.86 33.195,6.86 33.73,7.395 33.73,8.135 34.309,8.714 34.309,9.303 34.312,9.305 34.312,10.924 34.598,11.211 34.598,11.908 34.602,11.911 34.602,12.264 34.598,12.267 34.598,13.548 v1(34.965,13.915)
AREF: JP2.3
BMI270_INT1: U1.32 U2.4 | length 22
  TOP w0.15: v1(15.861,9.488) 15.867,9.488 16.127,9.228 16.127,8.472 16.309,8.29 16.377,8.29 16.477,8.19 16.752,8.19 U2.4@16.802,8.14 ; U1.32@32.402,6.14 32.402,6.705 32.745,7.049 32.745,7.345 v1(32.542,7.549)
  SIG w0.127: v1(15.861,9.488) 15.911,9.538 16.933,9.538 19.285,7.185 19.993,7.185 20.129,7.049 23.191,7.049 23.698,7.555 26.896,7.555 27.508,8.167 28.891,8.167 29.502,7.557 v1@32.542,7.557
BMI270_INT2: U1.50 U2.9 | length 12.2
  TOP w0.15: U2.9@19.752,8.64 19.767,8.654 20.131,8.654 v1(20.145,8.669)
  TOP w0.25: v1(27.981,9.974) 28.01,9.946 28.646,9.946 U1.50@28.702,9.89
  SIG w0.15: v1(20.145,8.669) 19.528,9.286 19.528,10.355 19.777,10.604 20.419,10.604 21.061,10.604 22.045,9.62 26.852,9.62 27.206,9.974 v1(27.981,9.974)
D2: JP3.5 U1.39 | length 8.4
  TOP w0.15: v1(34.177,12.088) 34.177,12.065 U1.39@34.602,11.64
  BOTTOM w0.15: JP3.5@29.195,16.51 30.182,15.523 32.327,15.523 34.206,13.644 34.206,12.116 v1(34.177,12.088)
D3~: JP3.6 U1.21 | length 9.9
  TOP w0.15: v1(33.446,15.514) 33.469,15.514 33.852,15.131 U1.21@33.852,13.015
  SIG w0.15: JP3.6@26.655,16.51 27.316,15.849 28.206,15.849 28.604,15.451 33.315,15.451 33.378,15.514 v1(33.446,15.514)
D4: JP3.7 U1.40 | length 12.7
  TOP w0.15: v1(33.352,12.149) 33.352,11.79 U1.40@33.502,11.64
  BOTTOM w0.15: JP3.7@24.115,16.51 24.192,16.51 25.37,15.332 29.646,15.332 29.811,15.168 32.258,15.168 33.352,14.074 v1(33.352,12.149)
D5~: JP3.8 U1.22 | length 13.4
  TOP w0.15: v1(32.816,13.841) 32.816,13.051 U1.22@32.852,13.015
  BOTTOM w0.15: JP3.8@21.575,16.51 22.442,15.643 23.586,15.643 24.197,15.032 29.522,15.032 29.686,14.868 32.133,14.868 32.816,14.185 v1(32.816,13.841)